# EAGLE board pcb (EAGLE 9.7.0)
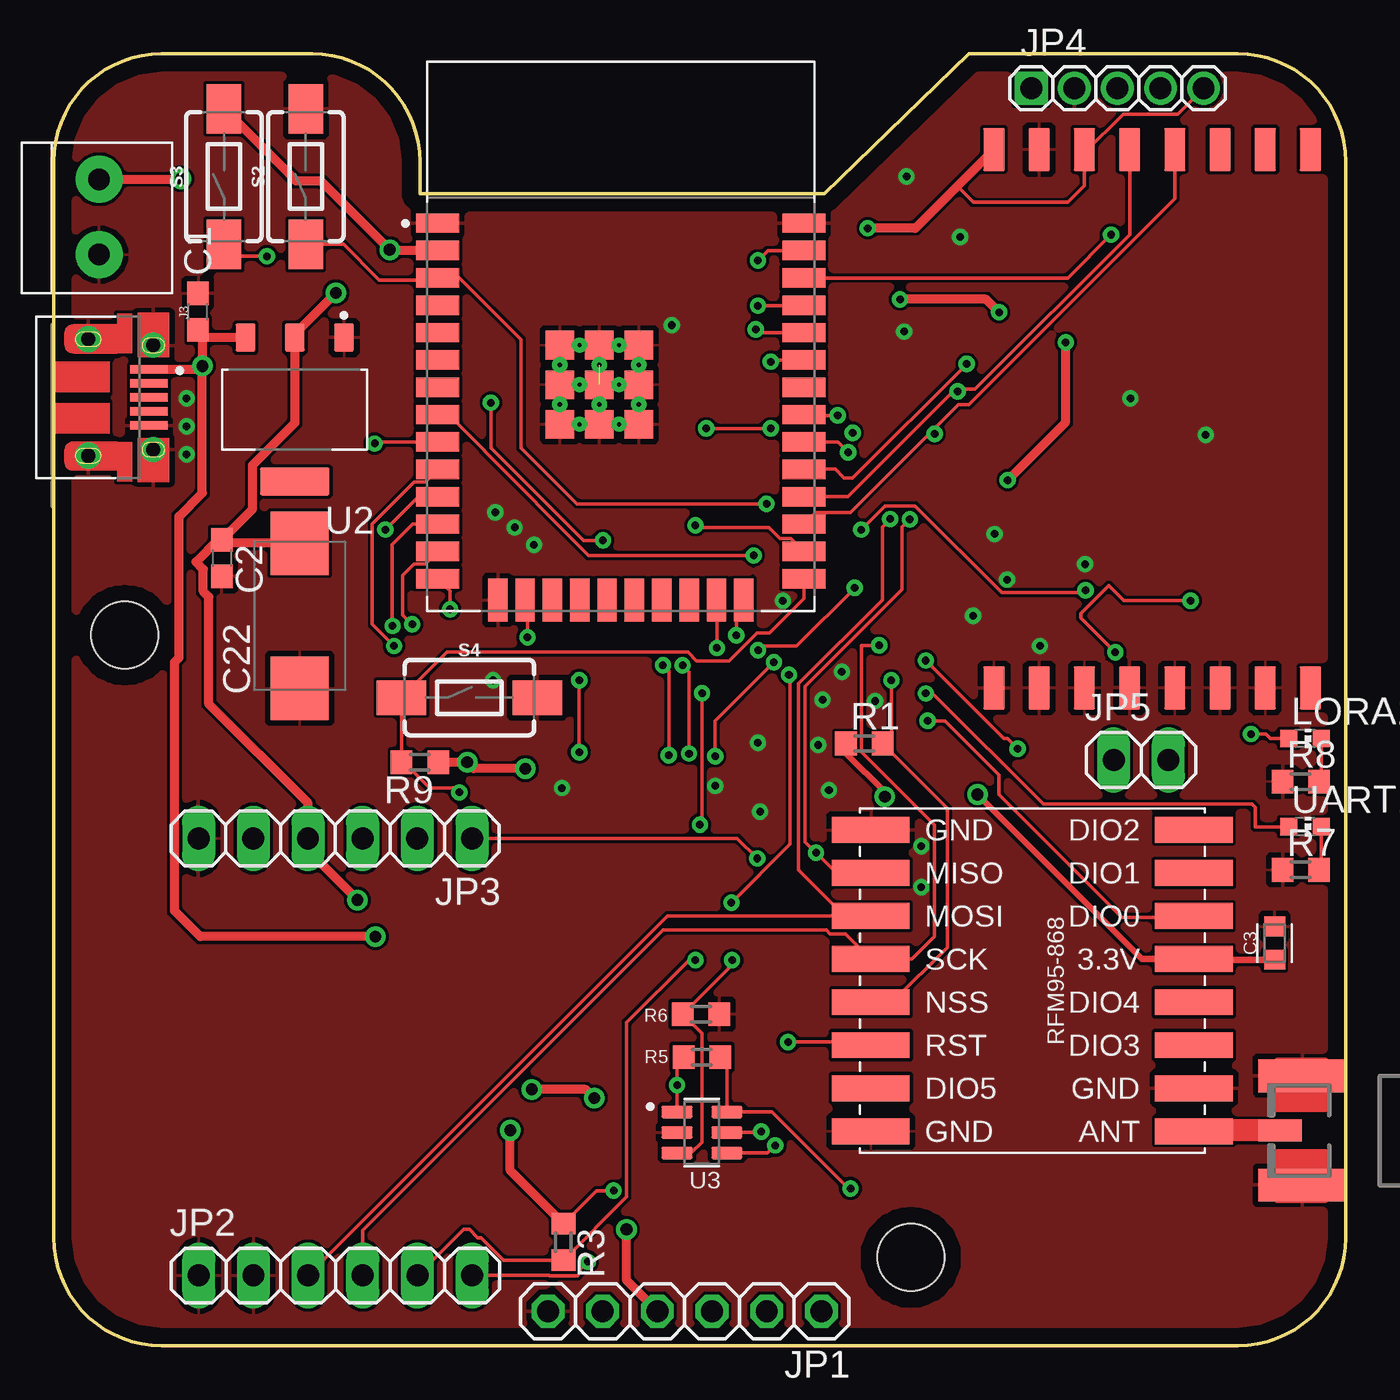
[diagram p0: board, top side]
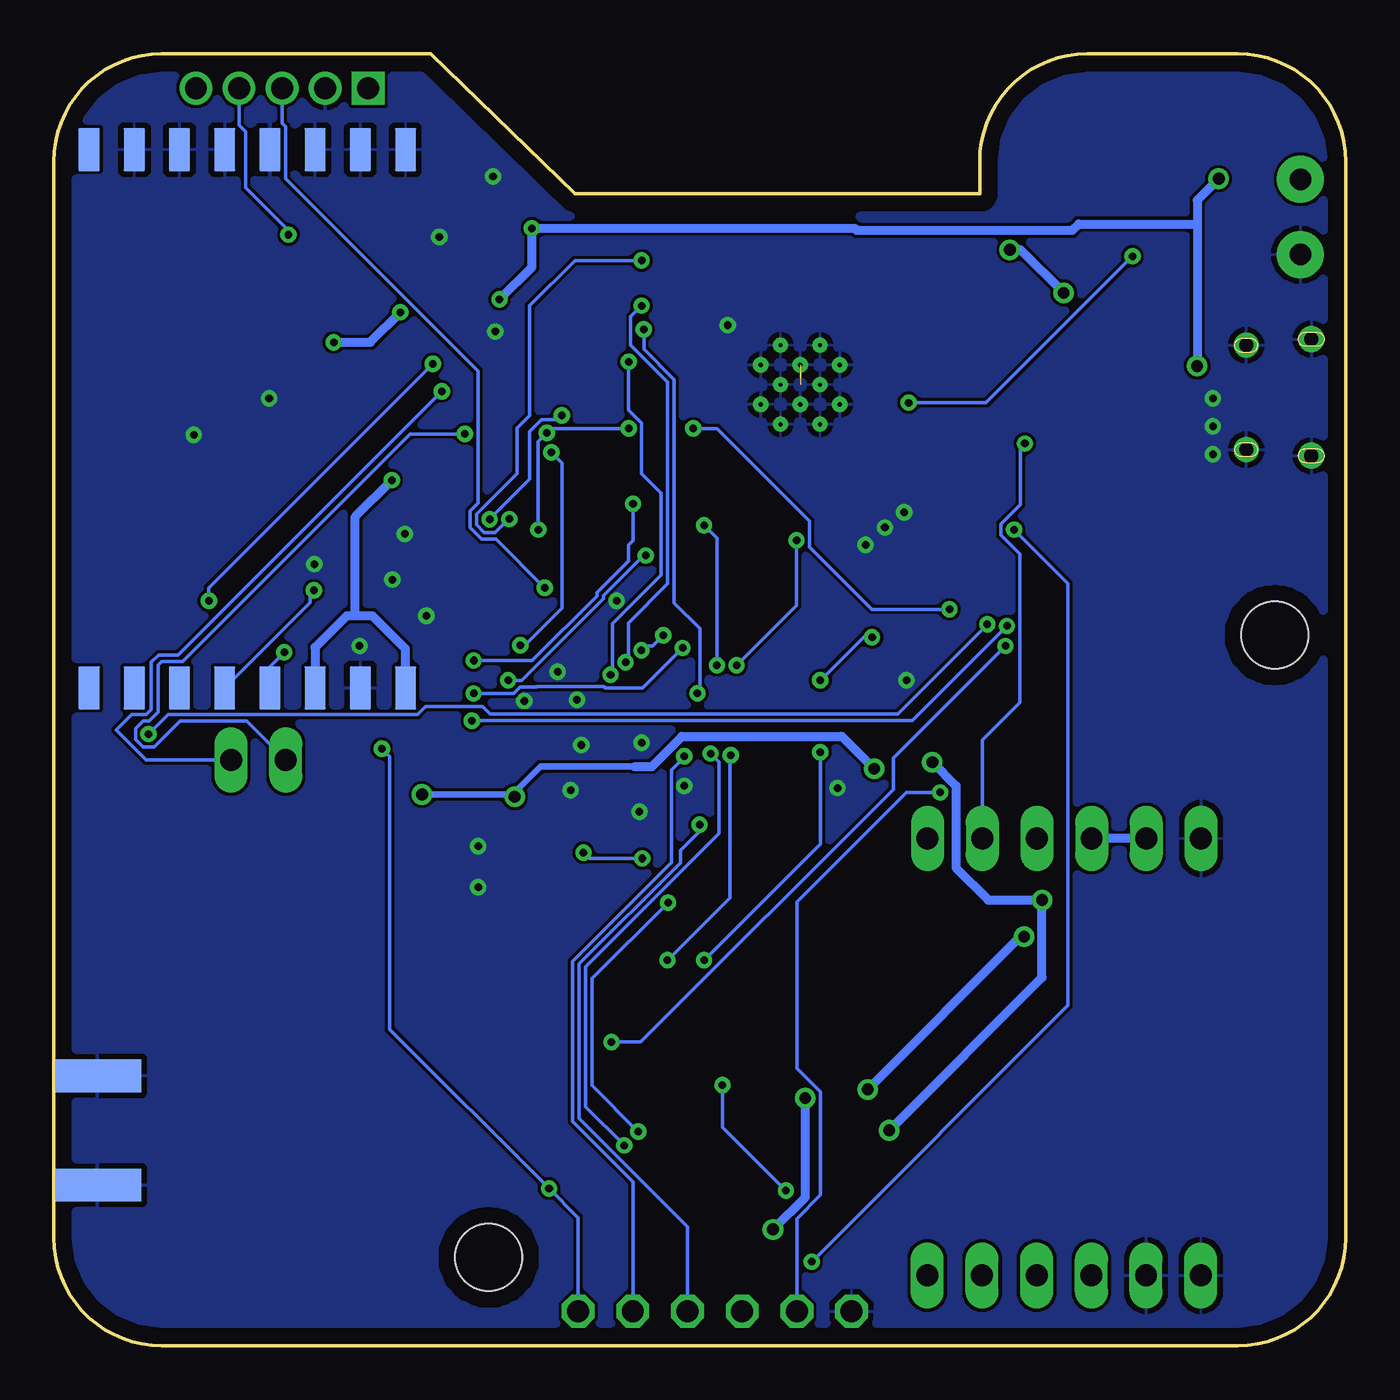
[diagram p1: board, bottom side, seen from below]

Size 60 x 60 mm. Coordinates in mm from the lower left corner, seen from the top.
Outline: 0,5 0,55 arc-90 5,60 12,60 arc-90 17,55 17,53.5 35.8,53.5 42.5,60 55,60 arc-90 60,55 60,5 arc-90 55,0 5,0 arc-90 0,5
Copper layers (1*16): Top / Bottom
Stack-up Default Layer Stack: Top User Defined 0.035mm / Dielectric-1 User Defined 1.5mm / Bottom User Defined 0.035mm
Design rules "default *": minimum track width 6mil, minimum drill 0.3mm, track to track 6mil, track to pad 6mil, pad to pad 6mil, via to via 6mil, smd to smd 6mil, copper to edge 30mil, drill to drill 6mil, minimum pad ring 10mil, minimum via ring 8mil, stop-mask expansion 4mil, vias tented up to drill 0mil, thermal gap 10mil
Holes 3.1 mm at 3.3,33 39.8,4.1

## Footprints (pad centres in the part's own frame; a part is rotated, then mirrored left to right if it is on the bottom)
C0603 = smd 1.1 x 1: 1 -0.85,0; 2 0.85,0
CAPC1608X85 = smd 0.921 x 0.97: 1 -0.775,0; 2 0.775,0
D/7343-31W = smd 2.95 x 2.7: + 3.375,0; - -3.375,0
1X2-3.5MM = drill 1 pad 2.184: 1 1.8,0; 2 -1.7,0
10103594-0001LF = smd 0.4 x 1.75: 1 -1.3,2.825; 2 -0.65,2.825; 3 0,2.825; 4 0.65,2.825; 5 1.3,2.825 | drill 0.65 pad 1.05: S1 -2.425,3.03; S2 2.425,3.03 | drill 0.66 pad 1.2: S3 -2.705,0; S4 2.705,0
1X06 = drill 1.016 octagon: 1 -6.35,0; 2 -3.81,0; 3 -1.27,0; 4 1.27,0; 5 3.81,0; 6 6.35,0
1X06' = drill 1.016 long: 1 -6.35,0; 2 -3.81,0; 3 -1.27,0; 4 1.27,0; 5 3.81,0; 6 6.35,0
1_05X2MM = drill 1.016 pad 1.3 square: 1 -4,0 | drill 1.016 pad 1.3: 2 -2,0; 3 0,0; 4 2,0; 5 4,0
1X02 = drill 1.016 long: 1 -1.27,0; 2 1.27,0
CHIP-LED0603 = smd 0.8 x 0.8: A 0,-0.75; C 0,0.75
R0603 = smd 1 x 1.1: 1 -0.85,0; 2 0.85,0
WIRELESS-LORA-RFM95W#SMD = smd 3.6 x 1.2: A1 -7.5,7; A2 -7.5,5; A3 -7.5,3; A4 -7.5,1; A5 -7.5,-1; A6 -7.5,-3; A7 -7.5,-5; A8 -7.5,-7; B1 7.5,7; B2 7.5,5; B3 7.5,3; B4 7.5,1; B5 7.5,-1; B6 7.5,-3; B7 7.5,-5; B8 7.5,-7
TACTILE_SWITCH_SMD_6.0X3.5MM = smd 2.3 x 1.6: 1 -3.15,0; 2 3.15,0
SOT229P700X180-4N = smd 0.93 x 1.31: 1 -2.29,-3.345; 2 0,-3.345; 3 2.29,-3.345 | smd 3.24 x 1.31: 4 0,3.345
SOT95P280X110-6N = smd 1.45 x 0.59: 1 -1.155,0.95; 2 -1.155,0; 3 -1.155,-0.95; 4 1.155,-0.95; 5 1.155,0; 6 1.155,0.95
MODULE_ESP32-WROOM-32D = smd 2 x 0.9: 1 -8.5,5.26; 2 -8.5,3.99; 3 -8.5,2.72; 4 -8.5,1.45; 5 -8.5,0.18; 6 -8.5,-1.09; 7 -8.5,-2.36; 8 -8.5,-3.63; 9 -8.5,-4.9; 10 -8.5,-6.17; 11 -8.5,-7.44; 12 -8.5,-8.71; 13 -8.5,-9.98; 14 -8.5,-11.25; 25 8.5,-11.25; 26 8.5,-9.98; 27 8.5,-8.71; 28 8.5,-7.44; 29 8.5,-6.17; 30 8.5,-4.9; 31 8.5,-3.63; 32 8.5,-2.36; 33 8.5,-1.09; 34 8.5,0.18; 35 8.5,1.45; 36 8.5,2.72; 37 8.5,3.99; 38 8.5,5.26 | smd 0.9 x 2: 15 -5.715,-12.25; 16 -4.445,-12.25; 17 -3.175,-12.25; 18 -1.905,-12.25; 19 -0.635,-12.25; 20 0.635,-12.25; 21 1.905,-12.25; 22 3.175,-12.25; 23 4.445,-12.25; 24 5.715,-12.25 | smd 1.33 x 1.33: 39_1 -2.835,-0.405; 39_2 -1,-0.405; 39_3 0.835,-0.405; 39_4 -2.835,-2.24; 39_5 -1,-2.24; 39_6 0.835,-2.24; 39_7 -2.835,-4.075; 39_8 -1,-4.075; 39_9 0.835,-4.075 | drill 0.2 pad 0.3: 39_10 -1.917,-0.405; 39_11 -0.083,-0.405; 39_12 -2.835,-1.323; 39_13 -1,-1.323; 39_14 0.835,-1.323; 39_15 -1.917,-2.24; 39_16 -0.083,-2.24; 39_17 -2.835,-3.158; 39_18 -1,-3.158; 39_19 0.835,-3.158; 39_20 -1.917,-4.075; 39_21 -0.083,-4.075
PR9200 = smd 2 x 1: 1 24.984,14.7; 2 24.984,12.6; 3 24.984,10.5; 4 24.984,8.4; 5 24.984,6.3; 6 24.984,4.2; 7 24.984,2.1; 8 24.984,0; 9 -0.016,0; 10 -0.016,2.1; 11 -0.016,4.2; 12 -0.016,6.3; 13 -0.016,8.4; 14 -0.016,10.5; 15 -0.016,12.6; 16 -0.016,14.7
SMA_EDGELAUNCH_UFL = smd 4.064 x 1.524: GND@1 2.032,-2.54; GND@2 2.032,2.54 | smd 4.064 x 1.524 bottom: GND@3 2.032,2.54; GND@4 2.032,-2.54 | smd 2.032 x 1.016: P 3.048,0

## Placement (x,y rotation side)
C1  [C0603]  6.7,48.03 90 top
C2  [C0603]  7.8,36.58 270 top
C3  [CAPC1608X85]  56.7,18.7 90 top
C22  [D/7343-31W]  11.42,33.9 90 top
J1  1X2-3.5MM  [1X2-3.5MM]  2.1,52.48 270 top
J3  10103594-0001LF  [10103594-0001LF]  1.59,44.04 270 top
JP1  [1X06]  29.3,1.6 180 top
JP2  PINHD-1X6  [1X06']  13.08,3.26 0 top
JP3  PINHD-1X6  [1X06']  13.07,23.56 180 top
JP4  PINHD-1X55X2MM  [1_05X2MM]  49.4,58.4 0 top
JP5  PINHD-1X2  [1X02]  50.5,27.2 0 top
LORA1  red  [CHIP-LED0603]  58.11,28.2 270 top
R1  10k  [R0603]  37.64,27.97 0 top
R3  10k  [R0603]  23.67,4.82 270 top
R5  10k  [R0603]  30.1,13.4 180 top
R6  10k  [R0603]  30.06,15.4 180 top
R7  [R0603]  57.91,22.1 0 top
R8  [R0603]  57.91,26.2 0 top
R9  [R0603]  17,27.1 180 top
RFM95-868  WIRELESS-LORA-RFM95W#SMD  [WIRELESS-LORA-RFM95W#SMD]  45.45,16.96 0 top
S2  MOMENTARY-SWITCH-SPST-SMD-6.0X3.5MM  [TACTILE_SWITCH_SMD_6.0X3.5MM]  11.7,54.3 90 top
S3  MOMENTARY-SWITCH-SPST-SMD-6.0X3.5MM  [TACTILE_SWITCH_SMD_6.0X3.5MM]  7.9,54.3 90 top
S4  MOMENTARY-SWITCH-SPST-SMD-6.0X3.5MM  [TACTILE_SWITCH_SMD_6.0X3.5MM]  19.3,30.1 0 top
U2  AMS1117-3.3  [SOT229P700X180-4N]  11.19,43.48 180 top
U3  TPL5010DDCT  [SOT95P280X110-6N]  30.1,9.9 0 top
U4  ESP32-WROOM-32D  [MODULE_ESP32-WROOM-32D]  26.33,46.87 0 top
U$1  PR9200  [PR9200]  43.66,55.54 270 top
U$2  PR9200  [PR9200]  43.66,30.57 90 bottom
UART1  green  [CHIP-LED0603]  58.11,24.1 270 top
X3  [SMA_EDGELAUNCH_UFL]  60,10 180 top

## Library data of the parts
C1 C2 = rcl; SPICEPREFIX: C
C3 = Tutorial - Fusion 360; CATEGORY: Capacitor
C22 J1 JP1 X3 = adafruit
J3 = Connectors; CREATED_BY: PCBLayout.com; DIGIKEY_PART_NUMBER: 609-4050-2-ND; MANUFACTURER: Amphenol ICC (FCI); MPN: 10103594-0001LF
JP2-JP5 = Connector; CATEGORY: CONNECTOR; SUB-CATEGORY: PIN-HEADER
LORA1 UART1 = led
R1 R3 R5-R9 = rcl; SPICEPREFIX: R
RFM95-868 = diy-modules
S2-S4 = SparkFun-Switches; PROD_ID: SWCH-00815; SF_SKU: COM-08229
U2 = AMS1117-3.3; AVAILABILITY: Unavailable; DESCRIPTION: Sot223/Pkg 1-Amp 3.3-Volt Low Drop Out Voltage Regulatator; MF: Advanced Monolithic Systems; MP: AMS1117-3.3; PACKAGE: None; PRICE: None
U3 = TPL5010DDCT; ARROW_ASIA-PURCHASE-URL: https://snapeda.com/shop?store=Arrow+Asia&id=219132; ARROW_ELECTRONICS-PURCHASE-URL: https://snapeda.com/shop?store=Arrow+Electronics&id=219132; AVAILABILITY: Good; DESCRIPTION: Ultra-low power timer with watchdog functionality & manual reset 6-SOT-23-THIN -40 to 105; DIGIKEY-PURCHASE-URL: https://snapeda.com/shop?store=DigiKey&id=219132; MF: Texas Instruments; MOUSER-PURCHASE-URL: https://snapeda.com/shop?store=Mouser&id=219132; MP: TPL5010DDCT; PACKAGE: SOT-23-THN-6 Texas Instruments; PRICE: None; TEXAS_INSTRUMENTS-PURCHASE-URL: https://snapeda.com/shop?store=Texas+Instruments&id=219132
U4 = ESP32-WROOM-32D; AVAILABILITY: Unavailable; DESCRIPTION: Bluetooth, WiFi 802.11b/g/n, Bluetooth v4.2 +EDR, Class 1, 2 and 3 Transceiver Module 2.4GHz ~ 2.5GHz Integrated, Trace Surface Mount; MF: Espressif Systems; MP: ESP32-WROOM-32D; PACKAGE: Module Espressif Systems; PRICE: None
U$1 U$2 = pr9200

## Nets
3.3V: C2.1 C3.1 C22.+ JP3.4 JP3.5 R1.1 R3.1 R5.2 R9.1 RFM95-868.B4 S3.2 U2.2 U3.1 U4.2
5V: C1.1 J1.2 J3.1 JP1.4 JP4.5 U2.3 U$1.9 U$1.11 U$2.9 U$2.11
CLK: JP2.4 RFM95-868.A4 U4.30
DONE: U3.4 U4.26
GND: C1.2 C2.2 C3.2 C22.- J1.1 J3.5 J3.S1 J3.S2 J3.S3 J3.S4 JP1.6 JP2.1 JP2.2 JP3.6 JP4.2 R6.1 R7.1 R8.1 RFM95-868.A1 RFM95-868.A8 RFM95-868.B7 S2.2 S4.2 U2.1 U3.2 U4.1 U4.15 U4.38 U4.39_1 U4.39_2 U4.39_3 U4.39_4 U4.39_5 U4.39_6 U4.39_7 U4.39_8 U4.39_9 U4.39_10 U4.39_11 U4.39_12 U4.39_13 U4.39_14 U4.39_15 U4.39_16 U4.39_17 U4.39_18 U4.39_19 U4.39_20 U4.39_21 U$1.2 U$1.3 U$1.4 U$1.5 U$1.6 U$1.7 U$1.8 U$1.10 U$2.2 U$2.3 U$2.4 U$2.5 U$2.6 U$2.7 U$2.8 U$2.10 X3.GND@1 X3.GND@2 X3.GND@3 X3.GND@4
INT_ETH: JP2.6 U4.11
IO1: JP4.4 U4.36
IO2: JP4.3 U4.24
LORA_IRQ: RFM95-868.B3 U4.12
LORA_RST: RFM95-868.A6 U4.10
LORA_SS: R1.2 RFM95-868.A5 U4.8
MCU_RST: JP1.1 R5.1 S2.1 U3.6 U4.3
MISO: JP3.1 RFM95-868.A2 U4.31
MOSI: JP2.3 RFM95-868.A3 U4.37
N$1: U4.23 UART1.A
N$2: R6.2 S3.1 U3.3
N$3: R7.2 UART1.C
N$4: LORA1.A U4.13
N$5: LORA1.C R8.2
N$6: JP1.5 R9.2 S4.1 U4.25
N$8: JP1.3 U4.34
N$9: JP1.2 U4.35
N$13: JP4.1
N$26: JP3.3
N$55: RFM95-868.B8 X3.P
RST_ETH: JP3.2 U4.9
RX1: U4.14 U$2.13
RX2: JP5.1 U4.27 U$1.13
SS_ETH: JP2.5 R3.2 U4.16
TX1: U4.29 U$2.12
TX2: JP5.2 U4.28 U$1.12
WAKE: U3.5 U4.33

## Tracks (layer width: path | path; a pad name or v marks a point on that pad's centre or on a via)
3.3V  (via drill 0.35, 0.55)
  Top 0.152: U3.1 v28.95,12.1 28.95,13.1 | R3.1 25.2,7.2 v26,7.2
  Top 0.305: R5.2 28.95,13.1 | RFM95-868.B4 52.8,17.96 | 52.8,17.96 50.54,17.96 v42.9,25.6 | R1.1 36.79,27.51 38.59,25.71 v38.59,25.49 | C3.1 52.83,17.93 52.8,17.96
  Top 0.406: 7.93,37.56 9.21,38.84 9.21,40.88 11.19,42.85 U2.2 11.19,46.99 v13.1,48.9 | 7.93,37.56 C2.1 7.63,37.43 6.6,36.4 6.94,36.06 6.94,35.03 7.2,34.78 7.2,29.8 11.8,25.2 JP3.4 11.8,23 v14.1,20.7 | C22.+ 8.22,37.27 7.93,37.56 | R9.1 v19.2,27.1 19.5,26.8 v21.9,26.8 | R3.1 21.2,8.14 v21.2,10 | U4.2 15.64,50.86 v15.6,50.9 12.4,54.1 11.25,54.1 S3.2
  Bottom 0.152: v26,7.2 28.95,10.14 v28.95,12.1
  Bottom 0.305: v42.9,25.6 41.8,25.6 38.7,25.6 | 38.7,25.6 37.4,26.9 33.01,26.9 | 38.7,25.6 v38.59,25.49
  Bottom 0.406: JP3.5 JP3.4 | v19.2,27.1 18.1,26 18.1,22.2 16.6,20.7 v14.1,20.7 14.1,17.1 v21.2,10 | v21.9,26.8 23.4,28.3 30.83,28.3 32.23,26.9 33.01,26.9 | v15.6,50.9 15.1,50.9 v13.1,48.9
5V  (via drill 0.35, 0.55)
  Top 0.152: U$1.11 47.86,55.4 | 47.86,55.4 47.86,53.86 47.1,53.1 42.7,53.1 41.96,53.84 | JP4.5 52.2,57.2 49.66,57.2 47.86,55.4
  Top 0.406: U2.3 7.05,46.83 C1.1 6.9,46.98 v6.9,45.5 | J1.2 5.88,54.18 v5.9,54.2 | v6.9,45.5 6.74,45.34 J3.1 | JP1.4 26.6,3.03 v26.6,5.4 | v25.1,11.5 24.7,11.9 v22.2,11.9 | v6.9,45.5 6.9,39.6 5.82,38.52 5.82,31.96 5.6,31.75 5.6,20.2 6.8,19 v14.93,19 | U$1.9 41.96,53.84 40.01,51.9 v37.8,51.9 | v44.3,40.2 47,42.9 v47,46.6 | v43.9,48 43.3,48.6 v39.3,48.6
  Bottom 0.406: v5.9,54.2 6.9,53.2 6.9,52 | 6.9,52 v6.9,45.5 | v26.6,5.4 25.1,6.9 v25.1,11.5 | v22.2,11.9 15.1,19 v14.93,19 | 6.9,52 7,52.1 12.4,52.1 12.7,51.8 22.7,51.8 22.8,51.9 v37.8,51.9 37.8,50.1 v39.3,48.6 | U$2.9 43.66,32.36 45.2,33.9 46,33.9 | 46,33.9 46.4,33.9 47.86,32.44 U$2.11 | 46,33.9 46,38.5 v44.3,40.2 | v47,46.6 45.3,46.6 v43.9,48
CLK  (via drill 0.35)
  Top 0.152: JP2.4 14.35,5.35 28.3,19.3 35.88,19.3 36.05,19.13 36.78,19.13 RFM95-868.A4 39.86,17.96 40.9,19 40.9,24.19 37.52,27.57 37.52,32.53 v38.33,32.53 | U4.30 36.41,41.97 v36.89,41.49
  Bottom 0.152: v38.33,32.53 38.23,32.43 36.4,34.26 36.4,41 v36.89,41.49
DONE  (via drill 0.35)
  Top 0.152: U3.4 33.15,8.95 v33.5,9.3 | v29.5,27.5 29.5,31.3 v29.2,31.6 | U4.26 34.24,37.48 33.74,37.48 33.22,38 29.9,38 v29.8,38.1
  Bottom 0.152: v33.5,9.3 35.3,11.1 35.3,17.6 29.1,23.8 29.1,27.1 v29.5,27.5 | v29.2,31.6 29.2,37.5 v29.8,38.1
GND  (via drill 0.35)  (1 unrouted)
  other vias: 23.6,25.9 40.29,21.3 40.29,23.2 6.17,41.4 6.17,42.7 6.17,44 35.7,30 35.5,27.9 36,25.8 22.3,37.2 21.4,38 20.5,38.7 20.4,30.9 38.14,29.94 33.86,34.6 32.8,24.8 32.7,28 28.7,47.4 39.5,47.1 42.1,51.5 39.6,54.3 36.6,31.3 53.5,42.3 50,44 30.71,26 44.28,35.58 47.9,36.3 45.8,32.5 42.7,33.9 43.7,37.7
  pour Top: -7.5,66 67.9,66 67.9,-11.3 -7.5,-11.3
  pour Bottom: -8.5,67.3 69.6,67.3 69.6,-14 -8.5,-14
INT_ETH  (via drill 0.35)
  Top 0.152: JP2.6 23.01,3.26 23.02,3.24 24.32,3.24 24.45,3.38 24.45,3.55 v24.8,3.9 | v15.4,37.9 16.93,39.43 U4.11
  Bottom 0.152: v24.8,3.9 12.9,15.8 12.9,35.4 v15.4,37.9
IO1  (via drill 0.35)
  Top 0.152: v49.1,51.6 47.09,49.59 U4.36
  Bottom 0.152: v49.1,51.6 49.1,51.79 51.09,53.78 51.09,56.38 51.4,56.69 JP4.4
IO2  (via drill 0.35)
  Top 0.152: v37.2,35.2 34.5,32.5 32.92,32.5 v32.71,32.29 | v31.7,33 31.7,34.28 U4.24
  Bottom 0.152: v31.7,33 32.2,32.5 32.5,32.5 v32.71,32.29 | JP4.3 49.4,56.78 49.23,56.62 49.23,54.19 40.3,45.26 40.3,39.13 40.67,38.76 40.67,38 40.14,37.47 39.47,37.47 v37.2,35.2
LORA_IRQ  (via drill 0.35)
  Top 0.152: RFM95-868.B3 52.89,19.9 49.6,19.9 43.9,25.6 43.9,26.5 41.38,29.02 v40.58,29.02 | U4.12 16.66,38.16 15.7,37.2 15.7,33.46 v15.73,33.43
  Bottom 0.152: v40.58,29.02 v40.57,29.03 20.13,29.03 v15.73,33.43
LORA_RST  (via drill 0.35)
  Top 0.152: U4.10 17.24,40.11 16.74,40.11 14.79,38.17 14.79,33.51 v15.8,32.5 | v34.1,14.1 37.8,14.1 RFM95-868.A6
  Bottom 0.152: v15.8,32.5 21,27.3 21,25.84 32.74,14.1 v34.1,14.1
LORA_SS  (via drill 0.35)
  Top 0.152: RFM95-868.A5 38.96,15.96 41.5,18.5 41.5,24.96 R1.2 38.9,28.38 v38.9,30.9 | U4.8 18.32,43.25 20,41.58 20,41.55 24.84,36.7 v32.51,36.7
  Bottom 0.152: v38.9,30.9 38.27,30.9 34.47,34.7 34.47,34.85 32.62,36.7 v32.51,36.7
MCU_RST  (via drill 0.35)
  Top 0.152: S2.1 13.45,51.15 15.1,49.5 17.74,49.5 U4.3 18.82,49.6 21.7,46.73 21.7,41.7 24.3,39.1 v33.1,39.1 | v44.77,27.73 44.29,28.21 44.12,28.21 v40.5,31.82 | R5.1 31.25,13.1 U3.6 33.35,10.85 36.9,7.3 v37,7.3
  Bottom 0.152: JP1.1 35.65,5.95 v37,7.3 44.4,14.7 44.4,27.36 v44.77,27.73 | v33.1,39.1 33.1,37.39 33.31,37.18 33.31,36.44 34.77,34.97 34.77,34.83 37.78,31.82 v40.5,31.82
MISO  (via drill 0.35)
  Top 0.152: RFM95-868.A2 36.34,21.96 v35.4,22.9 34.89,23.41 34.89,30.62 39.39,35.11 39.39,38.01 v39.76,38.38 | JP3.1 31.74,23.56 v32.67,22.63 | v36.41,43.21 34.87,43.21 U4.31
  Bottom 0.152: v32.67,22.63 35.13,22.63 v35.4,22.9 | v39.76,38.38 37.9,40.24 37.9,42.46 37.35,43.01 36.61,43.01 v36.41,43.21
MOSI  (via drill 0.35)
  Top 0.152: JP2.3 28.51,19.96 RFM95-868.A3 36.73,19.96 34.59,22.09 34.59,30.74 38.48,34.63 38.48,38.02 v38.85,38.39 | U4.37 33.16,50.86 v32.7,50.4
  Bottom 0.152: v32.7,50.4 35.8,50.4 37.9,48.3 37.9,43.2 38.49,42.61 38.49,40.51 40.37,38.63 40.37,38.13 40.01,37.77 39.51,37.77 38.89,38.39 v38.85,38.39
N$1  (via drill 0.35)
  Top 0.152: U4.23 30.8,34.6 v30.8,32.41 | v40.5,30.29 40.81,30.29 45.95,25.15 55.65,25.15 55.8,25 55.8,24.1 UART1.A
  Bottom 0.152: v40.5,30.29 38.65,30.29 38.35,30.59 37.57,30.59 37.56,30.61 34.45,30.61 34.4,30.55 32.66,30.55 v30.8,32.41
N$2  (via drill 0.35)
  Top 0.152: 29.3,8.95 29.1,8.95 | 29.1,8.95 U3.3 28.92,8.98 | v20.3,43.8 20.3,41.7 24.6,37.4 v25.51,37.4 | v9.9,50.6 8.45,50.6 S3.1 | 29.1,8.95 29.13,8.98 29.62,8.98 30.1,9.46 30.1,14.5 R6.2 31.5,17.69 v31.5,17.9 | v28.29,31.6 28.57,31.32 v28.57,27.43
  Bottom 0.152: v20.3,43.8 16.7,43.8 v9.9,50.6 | v31.5,17.9 28.59,20.8 28.59,27.4 v28.57,27.43 | v28.29,31.6 25.51,34.38 v25.51,37.4
N$3
  Top 0.152: R7.2 58.86,22.2 UART1.C
N$4  (via drill 0.35)
  Top 0.152: U4.13 17.24,36.3 16.74,36.3 16.2,35.77 16.2,33.94 v16.64,33.5 | LORA1.A 56.5,28.2 56.29,28.41 v55.6,28.41
  Bottom 0.152: v16.64,33.5 20.81,29.34 39.73,29.34 40.09,29.69 42.73,29.69 43.1,29.32 54.69,29.32 v55.6,28.41
N$5
  Top 0.152: R8.2 58.86,26.3 LORA1.C
N$6  (via drill 0.35)
  Top 0.152: R9.2 16.15,27.2 | 16.15,27.2 S4.1 18.26,32.21 29.45,32.21 29.86,31.8 31.36,31.8 32.66,33.11 33.23,33.11 34.83,34.71 U4.25 | 16.15,27.2 17.45,25.9 18.63,25.9 v18.83,25.7
  Bottom 0.152: JP1.5 25.49,5.9 24.39,7 24.39,11.79 25.49,12.89 25.49,20.61 20.4,25.7 v18.83,25.7
N$8  (via drill 0.35)
  Top 0.152: U4.34 32.75,47.05 v32.6,47.2 | v30.11,30.3 30.11,24.3 v30.01,24.2
  Bottom 0.152: v32.6,47.2 32.6,46.29 31.19,44.88 31.19,34.49 30,33.3 30,30.41 v30.11,30.3 | JP1.3 30.57,5.51 35.6,10.55 35.6,17.73 30.9,22.43 30.9,23 30.01,23.89 v30.01,24.2
N$9  (via drill 0.35)
  Top 0.152: v32.7,48.3 34.81,48.3 U4.35 | v30.71,27.38 30.71,29.01 v33.44,31.74
  Bottom 0.152: v32.7,48.3 33.21,47.79 33.21,46.47 31.5,44.75 31.5,35.39 33.31,33.57 33.31,31.87 v33.44,31.74 | JP1.2 33.11,7.62 35.91,10.42 35.91,17.85 31.32,22.44 31.32,26.73 30.71,27.34 v30.71,27.38
N$55
  Top 1.016: X3.P 52.99,10 RFM95-868.B8
RST_ETH  (via drill 0.35)
  Top 0.152: v14.9,41.9 14.97,41.97 U4.9
  Bottom 0.152: JP3.2 16.88,28.12 15.13,29.87 15.13,36.77 16.01,37.65 16.01,38.15 15.1,39.06 15.1,41.7 v14.9,41.9
RX1  (via drill 0.35)
  Top 0.152: v37.5,37.9 38.6,39 40,39 44.03,34.97 47.81,34.97 v47.92,35.08 | U4.14 18.4,35.05 v18.4,34.2 | v30.3,42.6 v33.3,42.6
  Bottom 0.152: U$2.13 48.1,34.52 48.1,34.9 v47.92,35.08 | v37.5,37.9 37.5,42 v37.1,42.4 36.9,42.6 v33.3,42.6 | v18.4,34.2 22,34.2 24.9,37.1 24.9,38.3 29.2,42.6 v30.3,42.6
RX2  (via drill 0.35)
  Top 0.152: U4.27 35.37,38.7 37,38.7 40.65,42.35 | 40.65,42.35 v40.91,42.35 | 40.65,42.35 42.01,43.71 42.5,43.71 52.06,53.27 U$1.13
  Bottom 0.152: v40.91,42.35 43.45,42.35 54.02,31.78 55,31.78 55.16,31.62 55.16,29.43 55.57,29.02 55.85,29.02 56.21,28.66 56.21,28.16 55.85,27.8 55.35,27.8 54.13,29.02 51.05,29.02 JP5.1
SS_ETH  (via drill 0.35)
  Top 0.152: JP2.5 19.03,5.4 19.3,5.4 19.69,5.01 19.84,5.01 20.88,3.97 R3.2 26.61,6.91 26.61,15.01 29.5,17.9 v29.8,17.9 | v22,32.9 22,34.51 U4.16 | v24.4,27.57 v24.4,30.9
  Bottom 0.152: v29.8,17.9 24.4,23.3 v24.4,27.57 | v24.4,30.9 22.4,32.9 v22,32.9
TX1  (via drill 0.35)
  Top 0.152: U4.29 36.3,40.7 36.7,40.3 37.1,40.3 v42.4,45.6 | v52.8,34.6 49.7,34.6 49,35.3 47.7,34 47.7,33.8 v49.3,32.2
  Bottom 0.152: v42.4,45.6 52.8,35.2 v52.8,34.6 | v49.3,32.2 49.96,31.54 U$2.12
TX2  (via drill 0.35)
  Top 0.152: U4.28 36.87,39.43 41.87,44.43 | 41.87,44.43 v41.98,44.32 | U$1.12 49.96,51.61 42.79,44.43 41.87,44.43
  Bottom 0.152: JP5.2 55.7,27.2 57.1,28.6 56.38,29.32 55.7,29.32 55.47,29.55 55.47,31.74 55.12,32.09 54.21,32.09 v41.98,44.32
WAKE  (via drill 0.35)
  Top 0.152: v33.3,45.7 33.38,45.78 U4.33 | v32.86,9.94 32.81,9.9 U3.5 | v31.47,20.57 34.2,23.3 34.2,31.1 v34.14,31.16
  Bottom 0.152: v32.86,9.94 34.99,12.08 34.99,17.05 v31.47,20.57 | v34.14,31.16 34.05,31.25 34.05,33.55 31.8,35.8 31.8,39.6 32.69,40.49 32.69,42.85 33.3,43.46 v33.3,45.7